# Altium PCB ESP PCB.PcbDoc
Units mm, origin at the board's own origin, x right, y up, seen from the top; angles counter-clockwise.
Board outline 64.77 x 69.85 mm, 2 copper layers (Top Layer, Bottom Layer); 82 components, 51 nets, 262 pads, 75 vias.
Unrouted connection lines stored in the file: 1.
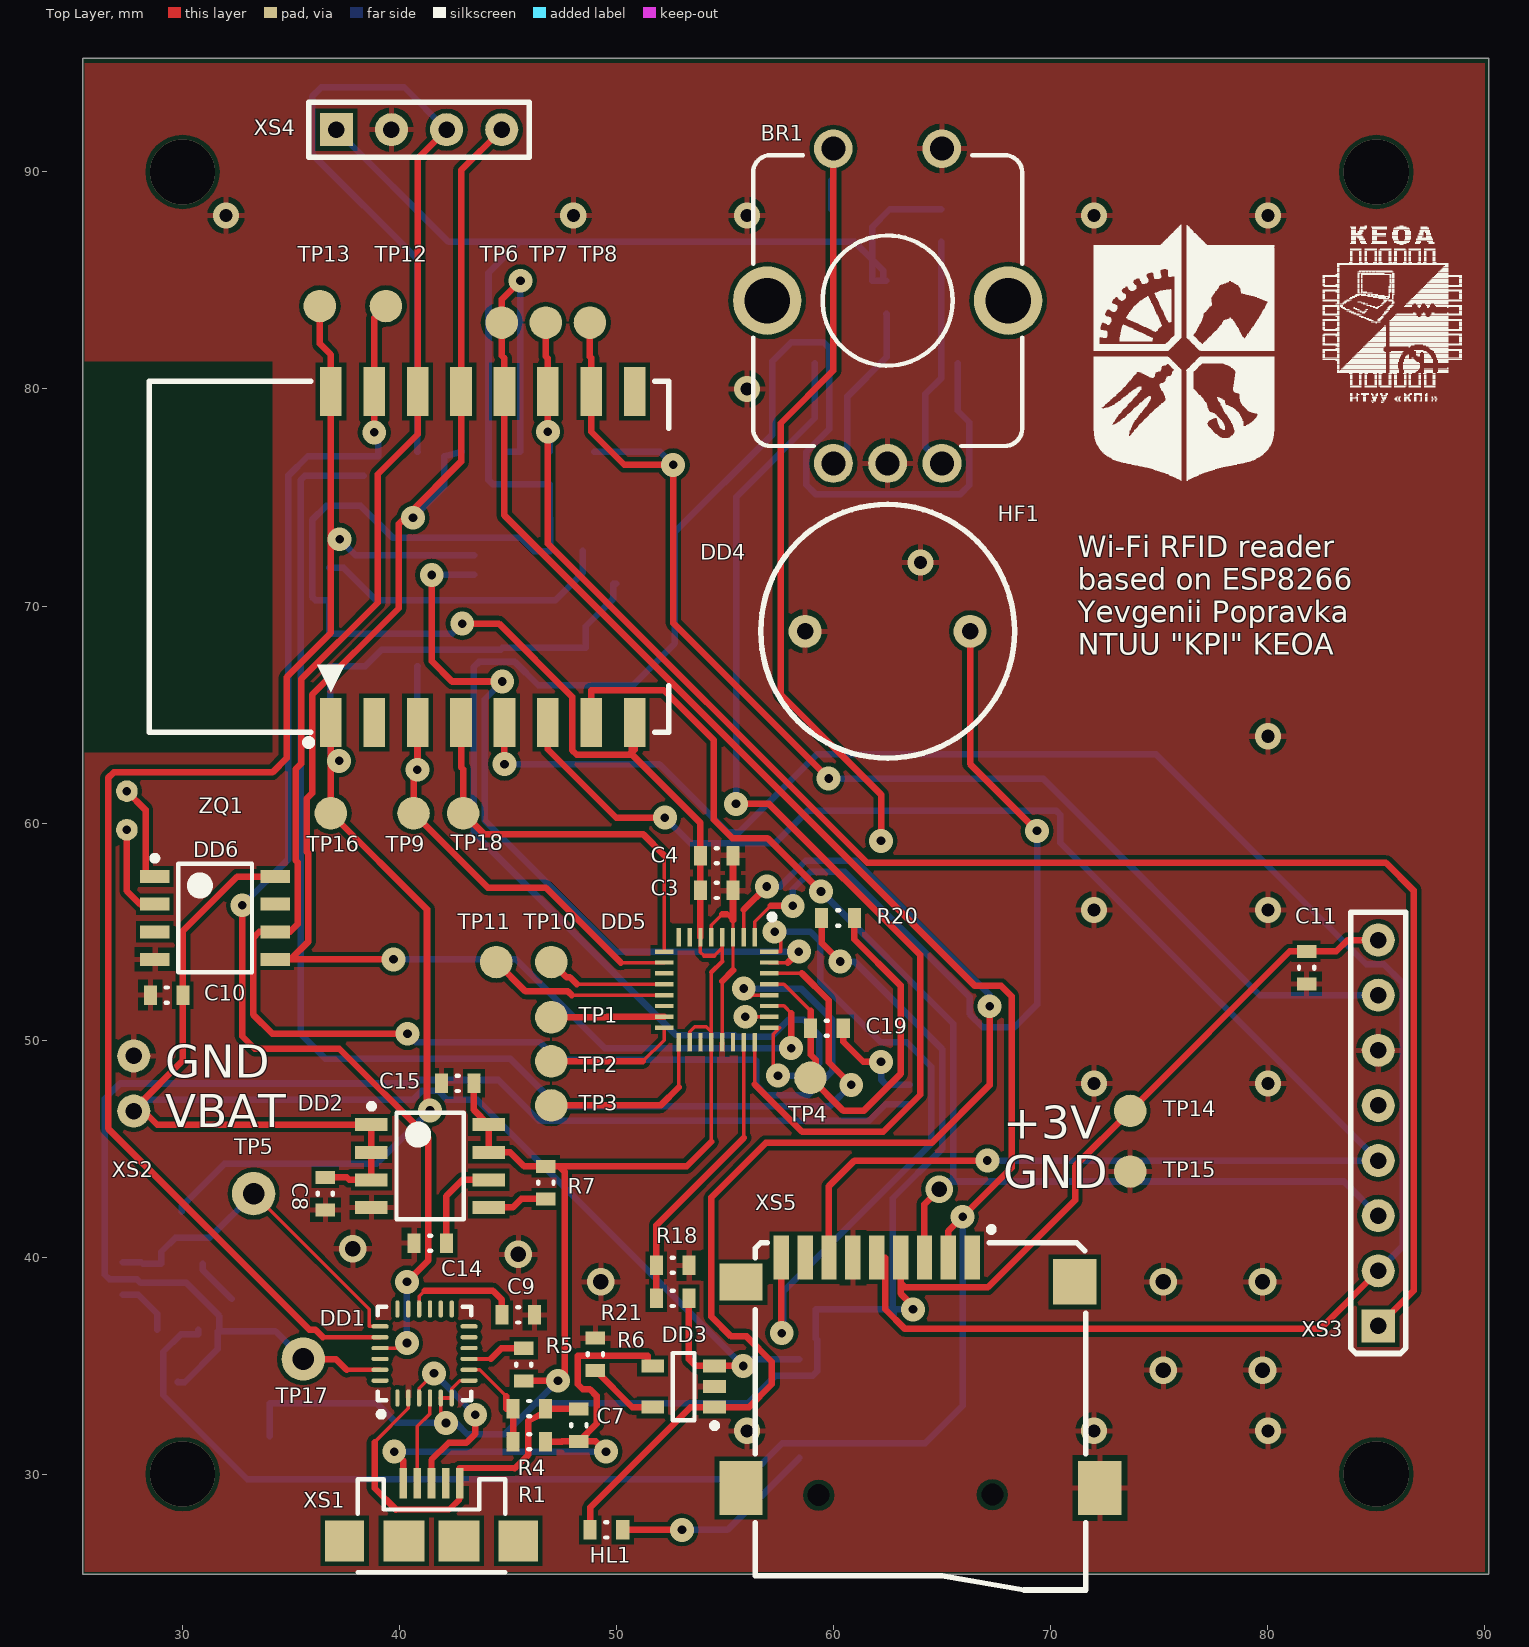
[diagram p0: Top Layer view]
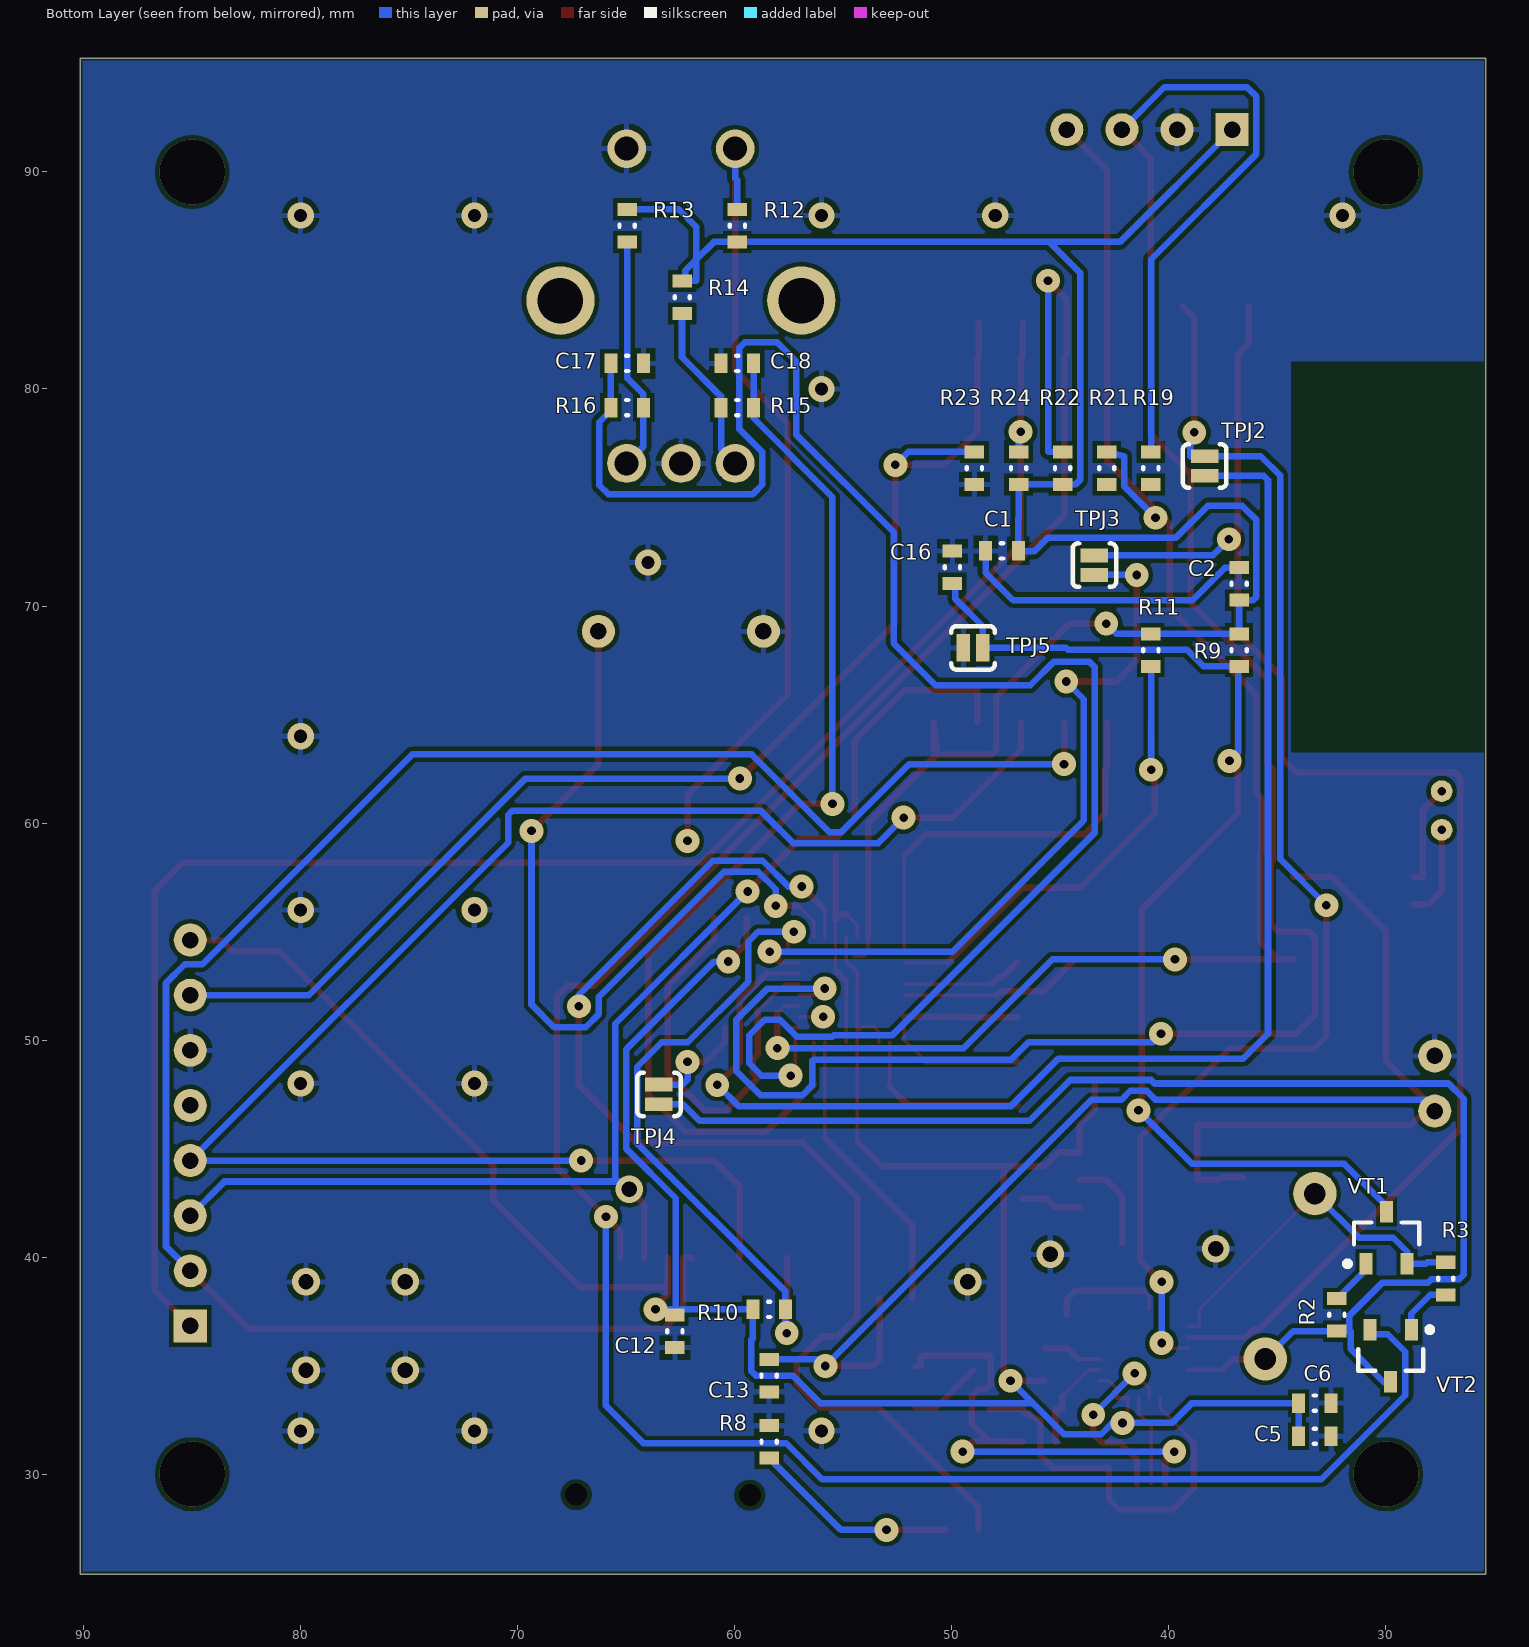
[diagram p1: Bottom Layer view, seen from below]

## Layer stack, top to bottom
Top Solder: solder mask 0.0102, Solder Resist, Dk 3.5
Top Layer: signal copper 0.0356
Dielectric 1: dielectric 0.32, FR-4, Dk 4.8
Bottom Layer: signal copper 0.0356
Bottom Solder: solder mask 0.0102, Solder Resist, Dk 3.5

## Board outline
25.4,25.4 25.4,95.25 90.17,95.25 90.17,25.4

## Design rules (kind name [scope] priority, off if disabled: settings)
Clearance [All] p1: gap=0.2
ComponentClearance ComponentClearance_1 [All] p1: gap=0.254 collisioncheckmode=3 verticalgap=0.254 showdistances=FALSE
ComponentClearance [HasFootprint('RFID-RC522')] p2: gap=0 collisioncheckmode=3 verticalgap=0 showdistances=FALSE
HoleSize [All] p1: absolutevalues=TRUE maxlimit=2.54 minlimit=0.3 maxpercent=80.000 minpercent=20.000
PlaneConnect [All] p1: planeconnectstyle=Relief reliefexpansion=0.508 reliefentries=4 reliefconductorwidth=0.25 reliefairgap=0.3
PolygonConnect [All] p1: connectstyle=Relief reliefconductorwidth=0.254 reliefentries=4 polygonreliefangle="90 Angle" airgapwidth=0.254
RoomDefinition "ESP_SCH_debug and testing" [InComponentClass('ESP_SCH_debug and testing')] p1: confinementstyle=ConfineIn formatcopy=TRUE lockcomponents=FALSE outline 16.75,23.75 165.608,23.75 165.608,134.874 16.75,134.874
RoomDefinition ESP_SCH [InComponentClass('ESP_SCH')] p2: confinementstyle=ConfineIn formatcopy=TRUE lockcomponents=FALSE outline 13.75,19.304 191.008,19.304 191.008,138.429 13.75,138.429
RoutingPriority d+ [InNet('D+')] p1: routingpriority=10
RoutingPriority d- [InNet('D-')] p2: routingpriority=10
RoutingPriority "I2C SCL" [InNet('ESP SCL')] p3: routingpriority=5
RoutingPriority "I2C SDA" [InNet('ESP SDA')] p4: routingpriority=5
RoutingPriority SCK [InNet('SCK')] p5: routingpriority=5
RoutingPriority MOSI [InNet('MOSI')] p6: routingpriority=5
RoutingPriority MISO [InNet('MISO')] p7: routingpriority=5
RoutingPriority RXD [InNet('USB RXD')] p8: routingpriority=5
RoutingPriority TXD [InNet('TEST TXD')] p9: routingpriority=5
RoutingVias [All] p1: holewidth=0.4 width=1.1 viastyle="Through Hole" minholewidth=0.3 minwidth=1 maxholewidth=0.6 maxwidth=1.2
SMDNeckDown SMDNeckDown_1 [All] p1: percent=80.000
SMDNeckDown [All] p2 off: percent=50.000
SolderMaskExpansion [All] p1: expansion=0.102
Width [All] p1: maxlimit=1 minlimit=0.15 preferedwidth=0.3
26 further rules are at their usual default settings.

## Classes and differential pairs
component class ESP_SCH: BR1 C1 C2 C3 C4 C5 C6 C7 C8 C9 C10 C11 C12 C13 C14 C15 C16 C17 C18 C19 DD1 DD2 DD3 DD4 DD5 DD6 HF1 HL1 R1 R2 R3 R4 R5 R6 R7 R8 R9 R10 R11 R12 R13 R14 R15 R16 R18 R19 R20 R21 R22 R23 R24 VT1 VT2 XS1 XS2 XS3 XS4 XS5 ZQ1
component class "ESP_SCH_debug and testing": TP1 TP2 TP3 TP4 TP5 TP6 TP7 TP8 TP9 TP10 TP11 TP12 TP13 TP14 TP15 TP16 TP17 TP18 TPJ2 TPJ3 TPJ4 TPJ5

## Components (designator, comment, footprint, x,y, rotation, side; value= is the part's Value field where it differs from the comment)
BR1 "ENC130175F-12PS" ENCODER_LED_2 62.484,84.074 r0 top
C1 "C0805" RES0603 47.689,72.542 r0 bottom
C2 "C0805" RES0603 36.767,71.018 r90 bottom
C3 "C0805" RES0603 54.61,56.896 r0 top
C4 "C0805" RES0603 54.61,58.496 r0 top
C5 "C0805" RES0603 33.274,31.75 r180 bottom
C6 "C0805" RES0603 33.274,33.274 r180 bottom
C7 "C0805" RES0603 48.26,32.258 r90 top
C8 "C0805" RES0603 36.576,42.926 r270 top
C9 "C0805" RES0603 45.466,37.338 r0 top
C10 "C0805" RES0603 29.261,52.07 r180 top
C11 "C0805" RES0603 81.788,53.34 r270 top
C12 "C0805" RES0603 62.763,36.576 r270 bottom
C13 "C0805" RES0603 58.42,34.544 r270 bottom
C14 "C0805" RES0603 41.402,40.64 r180 top
C15 "C0805" RES0603 42.672,48.006 r180 top
C16 "C0805" RES0603 49.975,71.78 r90 bottom
C17 "C0805" RES0603 64.961,81.178 r180 bottom
C18 "C0805" RES0603 59.881,81.178 r0 bottom
C19 "C0805" RES0603 59.69,50.546 r0 top
DD1 "CP2104-F03-GM" SLAB-QFN-24-2675x2675TP_M 41.148,35.56 r90 top
DD2 "MCP1725-3302E/MC" SOIC127P600X175-8N 41.402,44.196 r0 top
DD3 "MCP73831T" SOT95P270X145-5N 53.086,34.036 r180 top
DD4 "ESP-12" ESP_12_E 36.83,64.262 r90 top
DD5 "ATmega8A-MUR" QFN127P600-8N 54.61,52.324 r270 top
DD6 "PCF8563" SOIC8 31.496,55.626 r0 top
HF1 "KPX-G1201" PCBComponent_1 62.484,68.834 r0 top
HL1 "" RES0603 49.53,27.432 r0 top
R1 "R0805" RES0603 45.974,31.496 r0 top
R2 "R0805" RES0603 32.258,37.338 r270 bottom
R3 "R0805" RES0603 27.241,39.014 r90 bottom
R4 "R0805" RES0603 45.974,33.02 r180 top
R5 "R0805" RES0603 45.72,35.052 r90 top
R6 "R0805" RES0603 49.022,35.535 r270 top
R7 "R0805" RES0603 46.736,43.434 r90 top
R8 "R0805" RES0603 58.42,31.496 r270 bottom
R9 "R0805" RES0603 36.767,67.97 r90 bottom
R10 "R0805" RES0603 58.42,37.592 r0 bottom
R11 "R0805" RES0603 40.831,67.97 r90 bottom
R12 "R0805" RES0603 59.881,87.528 r270 bottom
R13 "R0805" RES0603 64.961,87.528 r90 bottom
R14 "R0805" RES0603 62.421,84.226 r90 bottom
R15 "R0805" RES0603 59.881,79.146 r180 bottom
R16 "R0805" RES0603 64.961,79.146 r0 bottom
R18 "R0805" RES0603 52.578,39.624 r180 top
R19 "R0805" RES0603 40.831,76.352 r270 bottom
R20 "R0805" RES0603 60.198,55.626 r180 top
R21 "R0805" RES0603 42.863,76.352 r270 bottom
R21 "R0805" RES0603 52.578,38.1 r0 top
R22 "R0805" RES0603 44.895,76.352 r270 bottom
R23 "R0805" RES0603 48.959,76.352 r90 bottom
R24 "R0805" RES0603 46.927,76.352 r270 bottom
TP1 "TP" "TP no hole" 46.99,51.054 r0 top
TP2 "TP" "TP no hole" 46.99,49.022 r90 top
TP3 "TP" "TP no hole" 46.99,46.99 r90 top
TP4 "TP" "TP no hole" 58.928,48.26 r90 top
TP5 "TP" "TP hole plated" 33.274,42.926 r90 top
TP6 "TP" "TP no hole" 44.704,83.058 r90 top
TP7 "TP" "TP no hole" 46.736,83.058 r90 top
TP8 "TP" "TP no hole" 48.768,83.058 r90 top
TP9 "TP" "TP no hole" 40.64,60.452 r90 top
TP10 "TP" "TP no hole" 46.99,53.594 r90 top
TP11 "TP" "TP no hole" 44.45,53.594 r90 top
TP12 "TP" "TP no hole" 39.37,83.82 r90 top
TP13 "TP" "TP no hole" 36.322,83.82 r90 top
TP14 "TP" "TP no hole" 73.66,46.736 r90 top
TP15 "TP" "TP no hole" 73.66,43.942 r90 top
TP16 "TP" "TP no hole" 36.83,60.452 r90 top
TP17 "TP" "TP hole plated" 35.56,35.306 r90 top
TP18 "TP" "TP no hole" 42.926,60.452 r90 top
TPJ2 "Jumper2" SJ_2S-NO 38.354,76.454 r270 bottom
TPJ3 "Jumper2" SJ_2S-NO 43.434,71.882 r270 bottom
TPJ4 "Jumper2" SJ_2S-NO 63.5,47.498 r90 bottom
TPJ5 "Jumper2" SJ_2S-NO 49.022,68.072 r180 bottom
VT1 "BC817" SOT95P245X110-3N 29.972,40.894 r90 bottom
VT2 "BC817" SOT95P245X110-3N 29.781,35.458 r270 bottom
XS1 "uUSB" USB-MICROB 41.466,26.924 r0 top
XS2 "battery" "PCBComponent_1 - duplicate" 27.75,48 r90 top
XS3 "RC522" RFID-RC522 87.63,26.67 r90 top
XS4 "SSD1306" SSD 26.924,66.548 r0 top
XS5 "uSD" "MICROSD Slot" 59.944,40.132 r90 top
ZQ1 "32kHz" "PCBComponent_1 - duplicate1" 27.432,61.468 r270 top

## Footprints (in the part's own frame and the unit in brackets; to place one, negate y for a bottom-side part, rotate by r counter-clockwise, add the part's x,y. Pads: shape width x height; smd on the part's side, far side on the other; paste and mask are expansions set on the pad)
ENCODER_LED_2 [mil]
  round 70.87 hole 43.31: EA(-98.43,-295.28) EB(98.43,-295.28) EC(0,-295.28)
  round 70 hole 43.31: K+(-98.43,275.59) K-(98.43,275.59)
  round 124.02 hole 82.68: P$1(-218.5,0) P$2(218.5,0)
  silkscreen extent -244,-264 244,264
ESP_12_E [mm] "ESP-12 Wi-Fi Module by AI-Thinker"
  rect 2.25x1 smd: 1(0.375,0) 2(0.375,-2) 3(0.375,-4) 4(0.375,-6) 5(0.375,-8) 6(0.375,-10) 7(0.375,-12) 8(0.375,-14) 9(15.625,-14) 10(15.625,-12) 11(15.625,-10) 12(15.625,-8) 13(15.625,-6) 14(15.625,-4) 15(15.625,-2) 16(15.625,0)
  silkscreen extent -0.7,-15.57 16.08,8.37, body extent 0,-15.49 16,8.51, height 2.75
"MICROSD Slot" [mil] "MicroSD Card Socket"
  rect 80x28 smd: 1(-6,-253.47) 2(-6,-210.16) 3(-6,-166.85) 4(-6,-123.55) 5(-6,-80.24) 6(-6,-36.93) 7(-6,6.38) 8(-6,49.68) 9(-6,92.99)
  rect 98.43x78.74 smd: 10(-424.01,-485) 13(-424.01,166)
  rect 83x78.74 smd: 11(-50,-439.8)
  rect 67x78.74 smd: 12(-50,166)
  round 23.62 hole 40 unplated: MH1(-436.89,25) MH2(-436,-289.96)
  silkscreen extent -609,-459 50,140, body extent -611,-460 21,140, height 67
PCBComponent_1 [mil]
  round 60 hole 30: 1(-149.61,0) 2(149.61,0)
"PCBComponent_1 - duplicate" [mil]
  round 60 hole 30: 1(-50,0) 2(50,0)
"PCBComponent_1 - duplicate1" [mm]
  round 1 hole 0.4: 1(0,0) 2(1.778,0)
QFN127P600-8N [mm]
  rect 0.85x0.2 smd: 1(-2.425,1.75) 2(-2.425,1.25) 3(-2.425,0.75) 4(-2.425,0.25) 5(-2.425,-0.25) 6(-2.425,-0.75) 7(-2.425,-1.25) 8(-2.425,-1.75) 17(2.425,-1.75) 18(2.425,-1.25) 19(2.425,-0.75) 20(2.425,-0.25) 21(2.425,0.25) 22(2.425,0.75) 23(2.425,1.25) 24(2.425,1.75)
  rect 0.2x0.85 smd: 9(-1.75,-2.425) 10(-1.25,-2.425) 11(-0.75,-2.425) 12(-0.25,-2.425) 13(0.25,-2.425) 14(0.75,-2.425) 15(1.25,-2.425) 16(1.75,-2.425) 25(1.75,2.425) 26(1.25,2.425) 27(0.75,2.425) 28(0.25,2.425) 29(-0.25,2.425) 30(-0.75,2.425) 31(-1.25,2.425) 32(-1.75,2.425)
  silkscreen extent -3.47,2.43 -3.23,2.68, body extent -2.55,-2.55 2.55,2.55, height 1
RES0603 [mm] "Chip Resistor, 2-Leads, Body 1,60x0,80mm, IPC Medium Density"
  rect 0.6x0.9 smd: 1(-0.75,0) 2(0.75,0)
  silkscreen extent -0.05,-0.35 0.05,0.35, body extent -0.85,-0.45 0.85,0.45, height 0.6
RFID-RC522 [mil] "NXP RFID Reader Module"
  rect 60x60 hole 30: 1(400,100)
  round 60 hole 30: 2(500,100) 3(600,100) 4(700,100) 5(800,100) 6(900,100) 7(1000,100) 8(1100,100)
  body extent 0,0 1500,2400, height 472
SJ_2S-NO [mm]
  rect 0.635x1.27 smd: 1(-0.45,0) 2(0.45,0)
  silkscreen extent -1,-1 1,1
SLAB-QFN-24-2675x2675TP_M [mm] "QFN, 24-Leads, Body 4x4mm, Pitch 0.5mm, Thermal Pad 2.68x2.68mm, IPC Low Density"
  oval 0.8x0.2 smd: 1(-2.05,1.25) 2(-2.05,0.75) 3(-2.05,0.25) 4(-2.05,-0.25) 5(-2.05,-0.75) 6(-2.05,-1.25) 13(2.05,-1.25) 14(2.05,-0.75) 15(2.05,-0.25) 16(2.05,0.25) 17(2.05,0.75) 18(2.05,1.25)
  oval 0.2x0.8 smd: 7(-1.25,-2.05) 8(-0.75,-2.05) 9(-0.25,-2.05) 10(0.25,-2.05) 11(0.75,-2.05) 12(1.25,-2.05) 19(1.25,2.05) 20(0.75,2.05) 21(0.25,2.05) 22(-0.25,2.05) 23(-0.75,2.05) 24(-1.25,2.05)
  silkscreen extent -2.92,-2.15 2.15,2.15, body extent -2,-2 2,2, height 0.8
SOIC8 [mm] "SOIC, 8-Leads, Body 4,90x4,00mm, Pitch 1,27mm, IPC Medium Density"
  rect 1.35x0.6 smd: 1(-2.775,1.905) 2(-2.775,0.635) 3(-2.775,-0.635) 4(-2.775,-1.905) 5(2.775,-1.905) 6(2.775,-0.635) 7(2.775,0.635) 8(2.775,1.905)
  silkscreen extent -2.9,-2.5 1.7,2.88, body extent -2.1,-2.5 2.1,2.5, height 1.75
SOIC127P600X175-8N [mm] "SOIC, 8-Leads, Body 4,90x3,90mm, Pitch 1,27mm, IPC Medium Density"
  rect 1.5x0.6 smd: 1(-2.7,1.905) 2(-2.7,0.635) 3(-2.7,-0.635) 4(-2.7,-1.905) 5(2.7,-1.905) 6(2.7,-0.635) 7(2.7,0.635) 8(2.7,1.905)
  silkscreen extent -2.82,-2.45 1.55,2.88, body extent -1.95,-2.45 1.95,2.45, height 1.75
SOT95P245X110-3N [mm] "SOT23, 3-Leads, Body 2,90x2,45mm, Pitch 0,95mm, IPC Medium Density"
  rect 1x0.6 smd: 1(-1.2,0.95) 2(-1.2,-0.95) 3(1.2,0)
  silkscreen extent -1.32,-1.5 0.7,1.93, body extent -0.7,-1.5 0.7,1.5, height 1.1
SOT95P270X145-5N [mm] "SOT23, 5-Leads, Body 2,90x2,70mm, Pitch 0,95mm, IPC Medium Density"
  rect 1.05x0.6 smd: 1(-1.425,0.95) 2(-1.425,0) 3(-1.425,-0.95) 4(1.425,-0.95) 5(1.425,0.95)
  silkscreen extent -1.55,-1.55 0.5,1.92, body extent -0.9,-1.55 0.9,1.55, height 1.45
SSD [mil]
  rect 60x60 hole 30: 1(400,1000)
  round 60 hole 30: 2(500,1000) 3(600,1000) 4(700,1000)
  body extent 0,0 1063,1063, height 472
"TP hole plated" [mm]
  round 2 hole 1: 1(0,0)
"TP no hole" [mm]
  round 1.5 smd: 1(0,0)
USB-MICROB [mm]
  rect 0.35x1.4 smd: 1(-1.3,2.65) 2(-0.65,2.65) 3(0,2.65) 4(0.65,2.65) 5(1.3,2.65)
  rect 1.8x1.9 smd: MT1(-4,0) MT2(4,0)
  rect 1.9x1.9 smd: P$1(-1.27,0) P$2(1.27,0)
  silkscreen extent -3.4,-1.45 3.4,2.85

## Part data
C1 C2 C3 C4 C5 C6 C7 C8 C9 C10 C11 C12 C13 C14 C15 C16 C17 C18 C19: "Chip capasitor"
DD1: "Single-Chip USB to UART Bridge, 4 Dig I/O Pins, Internal Oscillator, 1024 Bytes EEPROM, -40 to 85 degC, 24-pin QFN"
DD2: "MCP1725-3302E/MC ULDO"
DD3: "MCP73831T Li-ion/Li-po charger"
DD4: library part ESP-12E, "ESP-12 Wi-Fi Module"
DD5: "8-bit AVR Microcontroller, 2.7-5.5V, 16MHz, 8KB Flash, 512 Bytes EEPROM, 1KB SRAM, 33-pin MLF, Industrial Grade (-40°C to 85°C), Reel"
HF1: library part HF, "Пьезоизлучатель"
HL1: library part HL_02, "Светодиод"
R1 R2 R3 R4 R5 R6 R7 R8 R9 R10 R11 R12 R13 R14 R15 R16 R18 R19 R20 R21 R21 R22 R23 R24: "Резистор"
VT1 VT2: library part VT_01, "Транзистор биполярный, NPN"
XS1: library part usb, "micro USB"
XS2: library part lipo
XS3 XS5: "RC522 RFID module"
XS4: "SSD1306 OLED Screen Module"
ZQ1: library part ZQ_01, "Элемент пьезоэлектрический с двумя выводами"

## Via types
v1: diameter 1.1, hole 0.4, Top Layer to Bottom Layer, 48 vias
v2: diameter 1.2, hole 0.6, Top Layer to Bottom Layer, 15 vias
v3: diameter 1.27, hole 0.711, Top Layer to Bottom Layer, 8 vias
v4: diameter 3, hole 3, Top Layer to Bottom Layer, 4 vias

## Nets (pads, with @x,y where several pads share a name; then routed paths per layer and width w, separated by ;. In a path a pad name is that pad's centre, name@x,y a point inside that pad or via, vN(x,y) a via of type N, cw(c..) or ccw(c..) an arc to the next point about the centre after c; other vN are vias at no path point)
+3.3V: C1.1 C2.1 C3.1 C4.1 C5.1 C6.1 C11.1 C12.1 C15.1 DD1.5 DD1.6 DD1.7 DD2.7 DD2.8 DD4.8 DD5.4 DD5.6 DD5.18 DD5.20 R5.1 R7.2 R9.2 R10.2 R11.2 R12.2 R13.2 R14.2 R20.2 R22.2 R24.2 TP14.1 XS3.8 XS4.1 XS5.4 | length 235.9
  Top Layer w0.16: v1@41.898,32.025 DD1.5 ; DD1.6 42.398,33.93 42.778,34.31 DD1.7 ; DD5.18 53.36,50.394 53.589,50.622 54.131,50.622 54.36,50.394 ; DD5.6 53.86,54.051 54.026,53.885 ; 54.36,45.318 DD5.20 54.36,50.394 ; 54.36,53.125 54.36,50.394 ; 54.491,53.885 54.86,54.254 ; 54.86,53.625 54.86,54.254 ; DD5.4 54.86,54.254
  Top Layer w0.2: DD1.5 DD1.6 ; 54.026,53.885 54.491,53.885 ; 54.36,53.125 54.86,53.625
  Top Layer w0.3: v1@41.898,32.025 42.042,32.025 42.139,32.122 v1(42.139,32.36) ; v1(42.887,69.19) 44.577,69.19 47.955,65.811 47.955,63.348 48.158,63.144 50.597,63.144 50.66,63.208 ; C15.1 43.422,46.781 DD2.8 DD2.7 45.085,44.831 45.732,44.184 R7.2 47.346,44.184 ; R5.1 v1(47.295,34.302) 47.6,34.607 47.6,43.93 47.346,44.184 ; DD5.6 C3.1 C4.1 53.86,60.008 50.66,63.208 ; 54.36,45.318 53.226,44.184 47.346,44.184 ; R20.2 59.448,54.471 v1(60.3,53.619) ; XS5.4 63.082,38.811 ; v1(63.652,37.592) 63.652,37.758 63.082,38.329 63.082,38.811 ; XS3.8 83.68,54.61 83.16,54.09 C11.1 81.014,54.09 TP14.1 71.122,44.198 71.122,42.624 67.107,38.608 63.285,38.608 63.082,38.811 ; 50.66,63.208 DD4.8 50.83,63.378 50.66,63.208
  Bottom Layer w0.3: C5.1 C6.1 38.938,33.274 39.853,32.36 v1(42.139,32.36) ; XS4.1 42.254,86.778 45.517,86.778 ; v1@42.593,32.36 43.112,31.841 44.833,31.841 46.267,33.274 ; v1(42.887,69.19) 42.418,68.72 R11.2 R9.2 C2.1 36.119,70.268 35.967,70.42 35.967,73.965 36.627,74.625 38.202,74.625 39.675,73.152 45.568,73.152 46.203,72.517 46.939,72.517 C1.1 46.939,74.041 46.927,74.053 R24.2 R22.2 44.298,75.602 44.094,75.805 44.094,85.356 45.517,86.778 ; v1(47.295,34.302) 46.267,33.274 ; v1(60.3,53.619) 60.956,53.619 64.991,49.585 64.991,44.983 62.726,42.719 62.726,37.592 v1(63.652,37.592) ; R14.2 R14.2@62.281,84.976 ; C12.1@62.763,37.555 C12.1 62.497,37.592 R10.2 59.17,36.246 59.233,36.183 59.233,34.747 59.03,34.544 57.328,34.544 56.058,33.274 46.267,33.274 ; R13.2 62.586,88.278 61.773,87.465 61.773,85.965 ; 45.517,86.778 R12.2 60.96,86.778 61.773,85.965 ; 61.773,85.965 62.281,85.457 R14.2@62.281,84.976 ; 61.773,85.965 61.773,84.976 R14.2@62.281,84.976
"CH STAT": DD3.1 DD5.2 HL1.1 | length 57.1
  Top Layer w0.16: DD5.2 55.86,56.012
  Top Layer w0.3: HL1.1 48.78,28.466 53.4,33.086 DD3.1 56.098,33.086 57.15,34.138 57.15,35.179 55.982,36.347 55.27,36.347 54.356,37.262 54.356,42.748 56.871,45.263 64.516,45.263 67.183,47.93 v1(67.183,51.562) ; 55.86,56.012 v1(56.921,57.074)
  Bottom Layer w0.3: v1(56.921,57.074) 57.531,57.074 58.717,58.26 61.011,58.26 67.183,52.087 v1(67.183,51.562)
D+: DD1.3 XS1.3 | length 8.6
  Top Layer w0.16: DD1.3 40.898,33.964 v1(41.58,34.646)
  Top Layer w0.28: XS1.3 41.466,30.658 42.253,31.445
  Top Layer w0.3: 42.253,31.445 43.078,31.445 43.485,31.852 v1(43.485,32.741)
  Bottom Layer w0.3: v1(41.58,34.646) v1(43.485,32.741)
D-: DD1.4 XS1.2 | length 4.2
  Top Layer w0.16: XS1.2 40.816,32.201 41.398,32.783 DD1.4
DTR: DD1.23 R2.2 TP17.1 TPJ4.1 VT2.3 | length 64.9
  Top Layer w0.2: 37.555,34.81 DD1.23
  Top Layer w0.3: TP17.1 37.059,35.306 37.555,34.81
  Bottom Layer w0.3: VT2.3 29.781,34.239 30.099,34.239 31.623,35.763 31.623,36.588 31.699,36.588 ; TP17.1 34.278,36.588 R2.2 31.699,36.588 ; TPJ4.1 62.389,47.048 61.615,46.274 46.436,46.274 44.549,48.161 40.822,48.161 40.661,48 27.121,48 26.416,47.295 26.416,39.192 26.619,38.989 27.889,38.989 28.067,38.811 30.175,38.811 31.699,37.287 31.699,36.588
"ENC A": C18.1 DD5.24 R15.2 | length 50.8
  Top Layer w0.16: 56.36,47.955 DD5.24
  Top Layer w0.3: v1(55.499,60.884) 57.023,60.884 63.986,53.921 63.986,47.48 62.279,45.774 58.542,45.774 56.36,47.955
  Bottom Layer w0.3: v1(55.499,60.884) 55.499,75.016 59.131,78.648 R15.2 C18.1
"ENC B": C17.1 DD5.25 R16.2 | length 83.4
  Top Layer w0.16: DD5.25 57.506,50.574 57.209,50.277 v1@57.209,48.582
  Top Layer w0.3: v1@57.209,48.582 v1(57.429,48.362)
  Bottom Layer w0.3: v1(57.429,48.362) 58.76,48.362 59.334,48.936 59.334,50.226 58.616,50.944 57.934,50.944 57.14,50.151 55.508,50.151 55.444,50.215 52.757,50.215 43.409,59.563 43.409,67.178 43.653,67.423 45.314,67.423 46.391,66.345 50.749,66.345 52.68,68.275 52.68,73.406 57.175,77.902 57.175,81.28 58.039,82.144 59.538,82.144 59.792,81.89 59.792,78.156 58.734,77.098 58.734,75.59 59.166,75.159 65.837,75.159 66.243,75.565 66.243,78.462 65.711,78.994 R16.2 C17.1
"ENC BUT": BR1.K+ DD5.26 R12.1 | length 38.8
  Top Layer w0.16: v1(55.931,51.074) DD5.26
  Top Layer w0.3: BR1.K+ 59.984,80.848 57.556,78.421 57.556,65.938 62.179,61.316 v1(62.179,59.182)
  Bottom Layer w0.3: R12.1 59.881,89.611 59.984,89.714 BR1.K+
"ESP EN": DD4.3 DD5.10 R11.1 TP9.1 | length 25
  Top Layer w0.16: 50.19,53.574 DD5.10
  Top Layer w0.3: v1(40.818,62.459) v1@40.818,62.611 ; DD4.3 DD4.3@40.83,64.008 ; 50.19,53.574 46.741,57.023 44.069,57.023 TP9.1 40.64,62.433 v1@40.818,62.611 ; v1@40.818,62.611 40.83,62.623 DD4.3@40.83,64.008 ; v1@40.818,62.611 40.818,63.996 DD4.3@40.83,64.008
  Bottom Layer w0.3: v1(40.818,62.459) 40.818,67.22 R11.1
"ESP RST": C16.1 DD4.1 R9.1 TP16.1 TPJ5.2 VT1.3 | length 54.1
  Top Layer w0.3: DD4.1 v1@36.83,63.246 ; v1(37.211,62.865) v1@36.83,63.246 ; v1(41.402,46.761) 41.402,47.066 41.261,47.208 41.261,56.021 TP16.1 36.83,62.865 v1@36.83,63.246
  Bottom Layer w0.3: VT1.3 29.972,42.342 31.928,44.298 38.938,44.298 v1(41.402,46.761) ; R9.1 R9.1@36.805,67.22 ; v1(37.211,62.865) 36.805,63.271 R9.1@36.805,67.22 ; C16.1 49.835,71.03 49.835,70.325 48.572,69.063 TPJ5.2 44.729,68.072 44.653,67.996 39.18,67.996 38.405,67.22 R9.1@36.805,67.22
"ESP SCL": DD4.14 DD5.28 DD6.6 R19.1 XS4.3 | length 108.7
  Top Layer w0.16: v1@56.155,52.074 DD5.28
  Top Layer w0.3: v1(40.361,50.292) 34.138,50.292 33.246,51.184 33.246,54.709 33.528,54.991 DD6.6 34.95,54.991 35.296,55.337 35.296,58.191 35.204,58.283 35.204,62.484 35.458,62.738 35.458,66.624 38.989,70.155 38.989,76.073 40.83,77.914 DD4.14 40.83,90.614 XS4.3 ; v1(55.855,52.375) v1@56.155,52.074
  Bottom Layer w0.3: v1(40.361,50.292) 40.742,49.911 46.457,49.911 47.269,49.098 56.388,49.098 56.439,49.047 56.439,47.904 56.882,47.462 58.815,47.462 59.944,48.59 59.944,50.927 58.496,52.375 v1(55.855,52.375) ; R19.1 40.818,77.102 40.818,85.979 35.966,90.83 35.966,93.472 36.398,93.904 40.208,93.904 XS4.3
"ESP SDA": DD4.13 DD5.27 DD6.5 R21.1@42.863,77.102 XS4.4 | length 75.1
  Top Layer w0.16: DD5.27 57.709,51.574 58.039,51.244
  Top Layer w0.3: DD6.5 34.976,53.721 ; v1(39.718,53.721) 34.976,53.721 ; v1(40.615,74.066) v1@40.427,74.254 ; XS4.4 42.83,90.074 DD4.13 42.83,76.657 v1@40.427,74.254 ; v1(58.039,49.632) 58.039,51.244 ; 34.976,53.721 35.796,54.541 35.796,58.597 35.712,58.681 35.712,61.122 35.966,61.376 35.966,65.913 39.954,69.901 39.954,73.781 v1@40.427,74.254
  Bottom Layer w0.3: v1(39.718,53.721) 45.364,53.721 49.454,49.632 v1(58.039,49.632) ; v1(40.615,74.066) 42.062,75.514 42.062,76.899 R21.1@42.863,77.102
GND: BR1.EC BR1.K- C1.2 C2.2 C3.2 C4.2 C5.2 C6.2 C7.2 C8.2 C9.2 C10.2 C11.2 C12.2 C13.2 C14.2 C15.2 C16.2 C17.2 C18.2 DD1.2 DD2.4 DD3.2 DD5.3 DD5.5 DD5.21 DD6.4 HF1.1 R4.1 R6.1 R8.1 R18.1 R23.1 TP15.1 TPJ5.1 XS1.5 XS2.2 XS3.6 XS4.2 XS5.6 XS5.10 | length 42.8
  Top Layer w0.16: 38.851,31.481 40.398,33.028 DD1.2 ; DD5.5 54.36,55.3 54.864,55.804 ; DD5.21 54.86,52.715 ; 55.067,55.804 55.36,55.511 DD5.3 55.36,53.215
  Top Layer w0.28: 39.827,28.372 42.283,28.372 42.766,28.854 XS1.5 42.766,30.277 45.314,30.277
  Top Layer w0.3: 38.851,31.481 38.851,29.348 39.827,28.372 ; 45.314,30.277 45.923,30.886 45.923,32.461 46.724,32.868 R4.1 ; R4.1@46.736,33.008 C7.2 ; 54.86,52.715 55.36,53.215 ; 54.864,55.804 55.067,55.804 ; 55.36,55.511 C3.2 C4.2
  Bottom Layer w0.3: C2.2 37.414,71.768 38.915,70.268 47.18,70.268 48.439,71.526 C1.2
  other v2: 56,32 72,32 80,32 72,48 80,48 72,56 80,56 80,64 64,72 56,80 32,88 48,88 56,88 72,88 80,88
  other v3: 75.184,34.798 79.756,34.798 49.276,38.862 75.184,38.862 79.756,38.862 45.466,40.132 37.846,40.386
GPIO0: DD4.12 R22.1 TP6.1 VT2.2 XS5.2 | length 118.3
  Top Layer w0.3: v1(45.568,84.988) 44.704,84.125 TP6.1 44.704,81.533 44.83,81.407 DD4.12 44.83,74.173 66.51,52.493 67.723,52.493 68.197,52.019 68.197,44.118 v1(65.938,41.859) 65.282,41.203 XS5.2
  Bottom Layer w0.3: VT2.2 30.731,36.449 29.921,36.449 29.108,35.636 29.108,33.636 32.975,29.769 55.982,29.769 57.633,31.42 64.211,31.42 65.938,33.147 v1(65.938,41.859) ; R22.1 45.568,77.102 v1(45.568,84.988)
GPIO2: DD4.11 R24.1 TP7.1 XS3.1 | length 78.4
  Top Layer w0.3: TP7.1 46.736,81.501 46.83,81.407 DD4.11 v1(46.83,78.029) 46.83,72.88 61.544,58.166 85.446,58.166 86.716,56.896 86.716,38.456 XS3.1
  Bottom Layer w0.3: v1(46.83,78.029) 46.914,77.945 46.914,77.102 R24.1
GPIO15: DD4.10 R23.2 TP8.1 XS3.7 | length 60.2
  Top Layer w0.3: TP8.1 48.768,81.494 48.83,81.432 DD4.10 48.83,78.029 50.354,76.505 v1(52.603,76.505) 52.603,69.215 v1(59.766,62.052)
  Bottom Layer w0.3: R23.2 52.006,77.102 v1(52.603,76.505) ; v1(59.766,62.052) 69.647,62.052 79.629,52.07 XS3.7
GPIO16: DD4.4 DD5.9 TP18.1 | length 18.7
  Top Layer w0.16: DD5.9 52.185,58.522
  Top Layer w0.3: DD4.4 42.83,62.58 42.926,62.484 TP18.1 43.905,59.473 51.233,59.473 52.185,58.522
"ICSP MISO": DD5.16 TP2.1 | length 6.2
  Top Layer w0.16: 51.206,49.022 52.185,50.001 DD5.16
  Top Layer w0.3: TP2.1 51.206,49.022
"ICSP MOSI": DD5.15 TP1.1 | length 5.2
  Top Layer w0.3: TP1.1 49.555,51.054 49.575,51.074 DD5.15
"ICSP RST": C19.1 DD5.29 R20.1 TP4.1 | length 19.3
  Top Layer w0.16: DD5.29 57.709,52.574 58.94,51.343
  Top Layer w0.3: 58.94,51.343 C19.1 58.94,49.33 59.171,49.099 59.171,48.503 TP4.1 60.452,46.736 61.377,46.736 63.079,48.438 63.079,52.516 60.948,54.647 R20.1
"ICSP SCK": DD5.17 TP3.1 | length 8.3
  Top Layer w0.16: 52.86,47.831 DD5.17
  Top Layer w0.3: TP3.1 52.019,46.99 52.86,47.831
MISO: DD4.6 XS3.4 XS5.7 | length 78.4
  Top Layer w0.3: DD4.6 46.83,63.398 49.98,60.249 v1(52.222,60.249) ; XS5.7 59.782,43.272 60.96,44.45 v1(67.081,44.45)
  Bottom Layer w0.3: v1(52.222,60.249) 53.394,59.077 57.305,59.077 58.789,60.561 70.261,60.561 70.442,60.379 70.442,59.098 XS3.4 v1(67.081,44.45)
MOSI: DD4.7 XS3.3 XS5.3 | length 58.4
  Top Layer w0.3: DD4.7 48.83,66.116 52.18,66.116 54.483,63.813 54.483,60.147 55.321,59.309 56.947,59.309 v1(59.411,56.845) ; XS5.3 64.182,42.436 v3(64.87,43.124)
  Bottom Layer w0.3: v1(59.411,56.845) 65.507,50.749 65.507,43.485 ; v3(64.87,43.124) 65.231,43.485 65.507,43.485 ; XS3.3 83.515,43.485 65.507,43.485
NetBR1_EA: BR1.EA R14.1 R15.1 | length 7.9
  Bottom Layer w0.3: BR1.EA 60.631,77.221 R15.1 60.631,79.654 62.433,81.457 62.433,83.476 R14.1
NetBR1_EB: BR1.EB R13.1 R16.1 | length 10.8
  Bottom Layer w0.3: R13.1 64.961,80.506 64.211,79.756 R16.1 64.211,77.347 BR1.EB
NetC9_1: C9.1 DD1.16 | length 5.4
  Top Layer w0.16: DD1.16 40.898,38.202 41.152,38.456
  Top Layer w0.3: 41.152,38.456 44.298,38.456 44.716,38.037 C9.1
NetC14_1: C14.1 DD2.6 | length 4.4
  Top Layer w0.3: C14.1 42.152,42.812 42.901,43.561 DD2.6
NetDD1_8: DD1.8 R1.1 R4.2 | length 4.6
  Top Layer w0.16: DD1.8 43.688,34.81 44.907,33.591
  Top Layer w0.3: 44.907,33.591 44.907,33.02 R4.2 R1.1
NetDD1_9: DD1.9 R5.2 | length 2.7
  Top Layer w0.2: DD1.9 44.196,35.31
  Top Layer w0.3: 44.196,35.31 44.688,35.802 R5.2
NetDD2_5: DD2.5 R7.1 | length 2.8
  Top Layer w0.3: DD2.5 45.212,42.291 45.605,42.684 R7.1
NetDD3_5: DD3.5 R6.2 | length 3.3
  Top Layer w0.3: R6.2 50.721,33.086 DD3.5
NetDD5_1: DD5.1 HF1.2 | length 37.5
  Top Layer w0.16: DD5.1 56.36,55.455 57.09,56.185
  Top Layer w0.3: 57.09,56.185 v1(58.115,56.185) ; HF1.2 66.284,62.723 v1(69.367,59.639)
  Bottom Layer w0.3: v1(58.115,56.185) 58.115,56.947 58.928,57.76 60.503,57.76 66.26,52.003 66.26,51.206 66.869,50.597 68.326,50.597 69.367,51.638 v1(69.367,59.639)
NetDD5_23: DD5.23 R18.2 R21.1@51.828,38.1 | length 13.5
  Top Layer w0.16: 55.86,45.491 DD5.23
  Top Layer w0.3: R21.1@51.828,38.1 R18.2 51.828,41.459 55.86,45.491
NetDD6_1: DD6.1 ZQ1.1 | length 4.7
  Top Layer w0.3: ZQ1.1 28.296,60.604 28.296,57.531 DD6.1
NetDD6_2: DD6.2 ZQ1.2 | length 4.4
  Top Layer w0.3: ZQ1.2 27.432,56.871 28.042,56.261 DD6.2
NetHL1_2: HL1.2 R8.2 | length 9.5
  Top Layer w0.3: HL1.2 v1(53.01,27.432)
  Bottom Layer w0.3: v1(53.01,27.432) 55.106,27.432 R8.2
NetR2_1: R2.1 VT1.1 | length 2.2
  Bottom Layer w0.3: VT1.1 30.922,39.424 R2.1
NetR3_1: R3.1 VT2.1 | length 2.7
  Bottom Layer w0.3: R3.1 27.956,38.264 28.831,37.389 VT2.1
RTS: DD1.19 R3.2 TP5.1 VT1.2 | length 16.5
  Top Layer w0.16: TP5.1 38.608,37.592 38.608,36.81 DD1.19
  Bottom Layer w0.3: R3.2 28.092,39.764 28.163,39.694 VT1.2 29.022,40.249 29.667,40.894 31.242,40.894 TP5.1
SCK: DD4.5 XS3.2 XS5.5 | length 91.2
  Top Layer w0.3: v1(44.83,62.713) DD4.5 ; XS5.5 62.377,39.98 62.377,37.595 63.28,36.692 82.412,36.692 XS3.2
  Bottom Layer w0.3: v1(44.83,62.713) 51.968,62.713 55.104,59.577 55.636,59.577 59.229,63.17 74.854,63.17 84.531,53.492 85.344,53.492 86.208,52.629 86.208,40.488 XS3.2
"TEST DTR": C19.2 TPJ4.2 | length 5
  Top Layer w0.3: C19.2 60.44,49.923 61.366,48.997 v1(62.179,48.997)
  Bottom Layer w0.3: v1(62.179,48.997) 62.179,48.184 62.415,47.948 TPJ4.2
"TEST LED1": DD5.12 TP10.1 | length 5.6
  Top Layer w0.16: 48.167,52.574 DD5.12
  Top Layer w0.3: TP10.1 47.691,52.893 47.848,52.893 48.167,52.574
"TEST LED2": DD5.13 TP11.1 | length 8.4
  Top Layer w0.16: 47.926,52.074 DD5.13
  Top Layer w0.3: TP11.1 45.801,52.243 47.756,52.243 47.926,52.074
"TEST RXD": DD5.30 TPJ2.2 | length 63.2
  Top Layer w0.16: DD5.30 58.534,53.074
  Top Layer w0.3: 58.534,53.074 59.766,51.841 59.766,48.981 v1(60.808,47.94)
  Bottom Layer w0.3: TPJ2.2 35.636,76.004 35.433,75.801 35.433,50.292 36.576,49.149 45.085,49.149 47.272,46.962 59.829,46.962 v1(60.808,47.94)
"TEST SS": DD5.14
"TEST TXD": DD5.31 TPJ3.2 | length 34.9
  Top Layer w0.16: DD5.31 57.892,53.574
  Top Layer w0.3: v1(41.478,71.432) 41.478,67.462 42.418,66.523 v1(44.729,66.523) ; 57.892,53.574 v1(58.395,54.077)
  Bottom Layer w0.3: v1(41.478,71.432) TPJ3.2 ; v1(44.729,66.523) 43.917,65.71 43.917,60.122 49.962,54.077 v1(58.395,54.077)
"USB RXD": DD1.20 DD4.16 TP13.1 TPJ3.1 | length 70.2
  Top Layer w0.2: 36.465,36.31 DD1.20
  Top Layer w0.3: TP13.1 36.322,82.093 36.83,81.585 DD4.16 36.83,73.482 ; 36.465,36.31 36.119,36.656 35.844,36.656 26.568,45.932 26.568,62.078 26.822,62.332 34.138,62.332 34.798,62.992 34.798,66.726 36.83,68.758 36.83,73.482 ; v1(37.236,73.076) 36.83,73.482
  Bottom Layer w0.3: v1(37.236,73.076) 37.98,72.332 TPJ3.1
"USB TXD": DD1.21 DD4.15 TP12.1 TPJ2.1 | length 60.2
  Top Layer w0.16: DD1.21 v1@40.103,35.81
  Top Layer w0.3: v1(32.746,56.216) 32.746,50.18 33.325,49.601 37.223,49.601 41.326,45.498 41.326,39.853 v1(40.335,38.862) ; v1(38.83,78.003) DD4.15 38.83,83.28 TP12.1 ; v1@40.103,35.81 v1(40.335,36.043)
  Bottom Layer w0.3: v1(32.746,56.216) 34.874,58.344 34.874,76.015 35.763,76.904 TPJ2.1 39.014,76.904 39.014,77.819 v1(38.83,78.003) ; v1(40.335,36.043) v1(40.335,38.862)
"USD CD": DD5.32 R10.1 XS5.9 | length 31
  Top Layer w0.16: DD5.32 57.556,54.074 57.556,54.712 v1(57.277,54.991)
  Top Layer w0.3: XS5.9 57.582,36.525 v1(57.607,36.5)
  Bottom Layer w0.3: v1(57.277,54.991) 58.928,54.991 59.385,54.534 59.385,52.68 62.168,49.897 63.362,49.897 64.491,48.768 64.491,45.237 57.67,38.417 R10.1 57.67,36.563 v1(57.607,36.5)
VBAT: C8.1 C10.1 C13.1 DD2.1 DD2.2 DD2.3 DD3.3 DD6.8 R21.2@53.328,38.1 XS2.1 | length 71.6
  Top Layer w0.3: DD6.8 32.512,57.531 30.011,55.03 C10.1 30.011,49.061 27.94,46.99 28.829,46.101 DD2.1 DD2.2 DD2.3 37.682,43.561 37.567,43.676 C8.1 ; R21.2@53.328,38.1 53.328,35.303 53.645,34.986 DD3.3 v1(55.829,34.986)
  Bottom Layer w0.3: XS2.1@27.94,46.99 28.2,47.25 40.618,47.25 41.029,47.661 41.775,47.661 42.186,47.25 43.565,47.25 v1(55.829,34.986) 56.137,35.294 C13.1
VBUS: C7.1 DD3.4 R1.2 XS1.1 | length 23.1
  Top Layer w0.28: v1(39.751,31.039) 40.166,30.624 XS1.1
  Top Layer w0.3: R1.2 47.473,31.496 47.485,31.508 C7.1 ; v1(49.505,31.039) 49.035,31.508 C7.1 ; DD3.4 51.435,34.986 51.435,35.458 48.209,35.458 48.209,34.138 48.438,33.909 48.768,33.909 49.073,33.604 49.073,32.321 C7.1
  Bottom Layer w0.3: v1(39.751,31.039) v1(49.505,31.039)
pads on no net: BR1.P$1 BR1.P$2 DD1.1 DD1.10 DD1.11 DD1.12 DD1.13 DD1.14 DD1.15 DD1.17 DD1.18 DD1.22 DD1.24 DD4.2 DD4.9 DD5.7 DD5.8 DD5.11 DD5.19 DD5.22 DD6.3 DD6.7 R19.2 R21.2@42.863,75.602 XS1.4 XS1.MT1 XS1.MT2 XS1.P$1 XS1.P$2 XS3.5 XS5.1 XS5.8 XS5.11 XS5.12 XS5.13 XS5.MH1 XS5.MH2
copper on no net:
  other v4: 30,30 85,30 30,90 85,90

## Polygon pours and split planes (outlines as drawn)
GND on Top Layer "GND_L01_P003" (solid, pour order 3): 25.5,95 25.5,81.28 34.163,81.28 34.163,63.246 25.5,63.246 25.5,25.5 90,25.5 90,95
GND on Bottom Layer "GND_L02_P002" (solid, pour order 2): 25.5,95.115 25.5,81.28 34.39,81.28 34.39,63.246 25.5,63.246 25.5,25.5 90.035,25.535 90.035,95.115

## Other copper
Top Layer:
  pour cut-out: 25.273,81.28 25.273,63.246 34.163,63.246 34.163,81.28

## Silkscreen, mask and mechanical layers (free items; w line width, h text height)
Top Overlay:
  drawing of 2926 lines, arcs and shapes, not listed
  text "Wi-Fi RFID reader / based on ESP8266 / Yevgenii Popravka / NTUU \"KPI\" KEOA" at 71.25,67.75 h1
  text "GND / VBAT" at 29.21,45.974 h1.52
  text "+3V / GND" at 67.818,43.18 h1.52

## Text inside footprints (layer, text, board x,y; h text height)
DD4: Mechanical 13 "ANTENNA AREA" at 28.956,64.389 h0.7 r90; Mechanical 13 "CUTOUT POLYGON" at 29.464,64.389 h0.7 r90
XS5: Mechanical 1 "PCB Edge" at 69.469,25.502 h0.7